# Altium PCB amg8833.PcbDoc
Units mm, origin at the board's own origin, x right, y up, seen from the top; angles counter-clockwise.
Board outline 25 x 17.5 mm, 2 copper layers (Top Layer, Bottom Layer); 10 components, 8 nets, 34 pads, 2 vias.
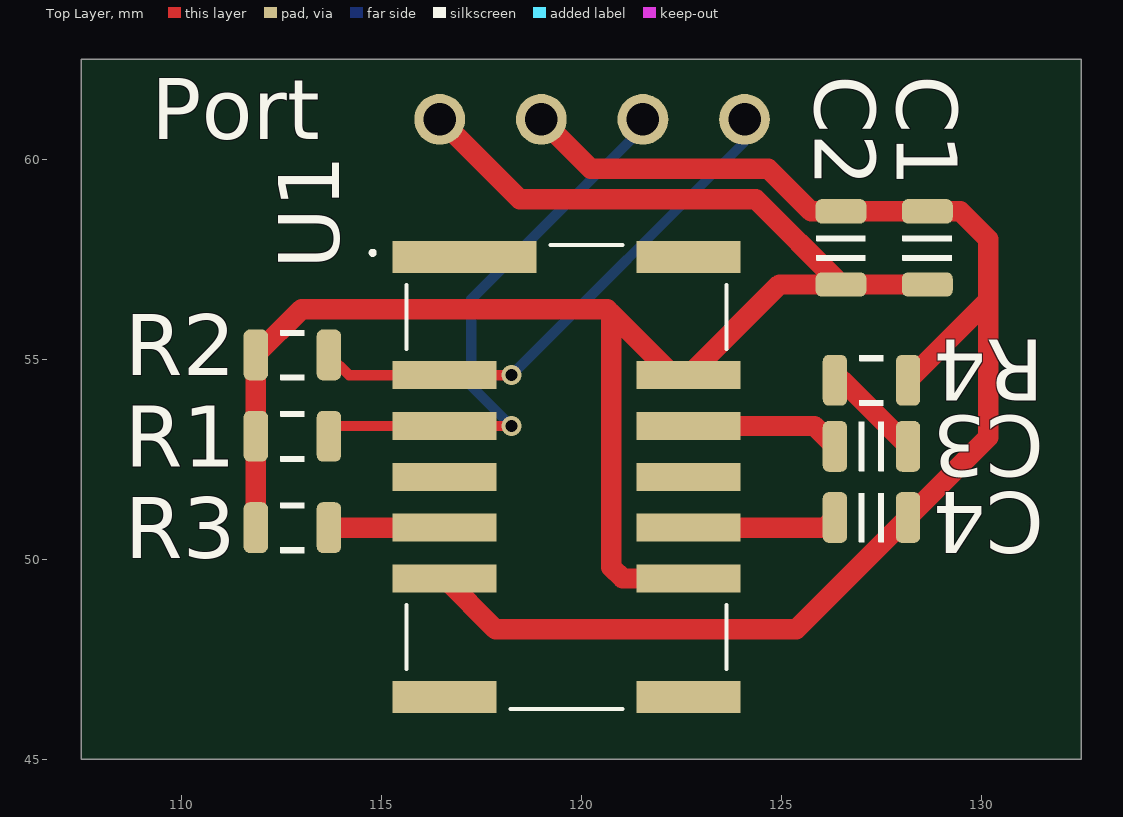
[diagram p0: Top Layer view]
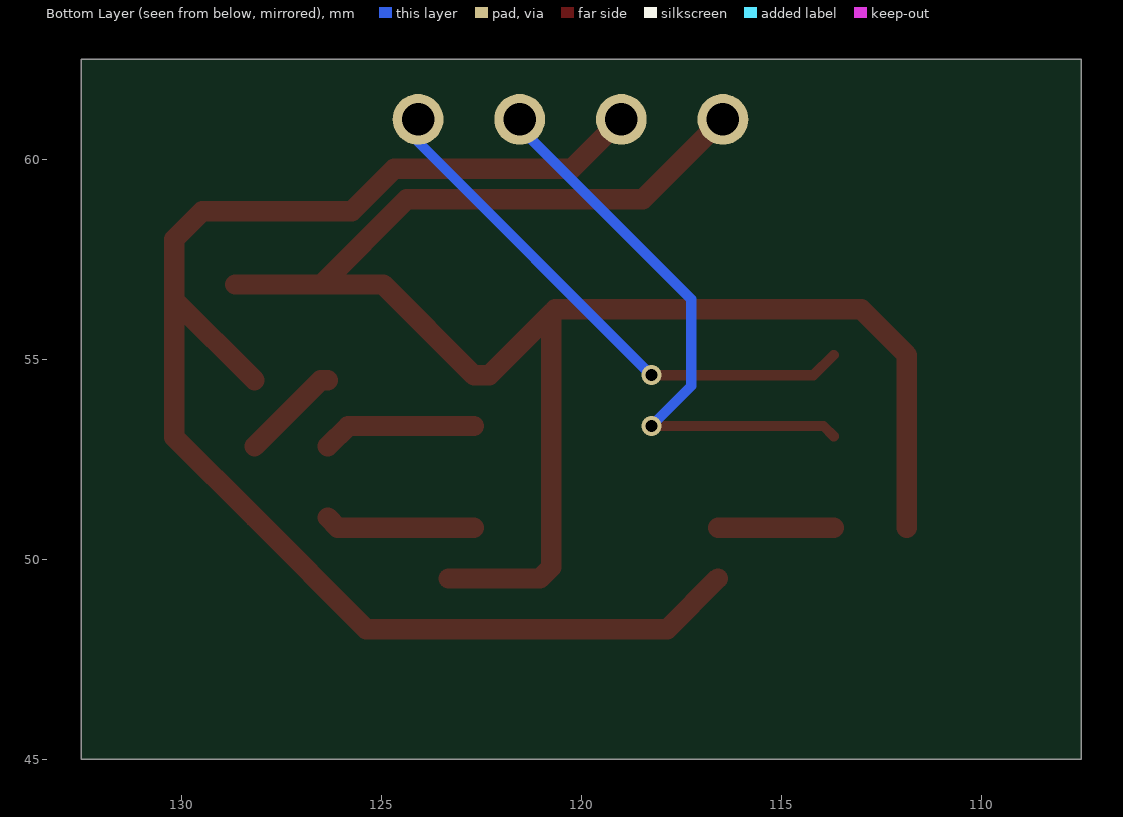
[diagram p1: Bottom Layer view, seen from below]
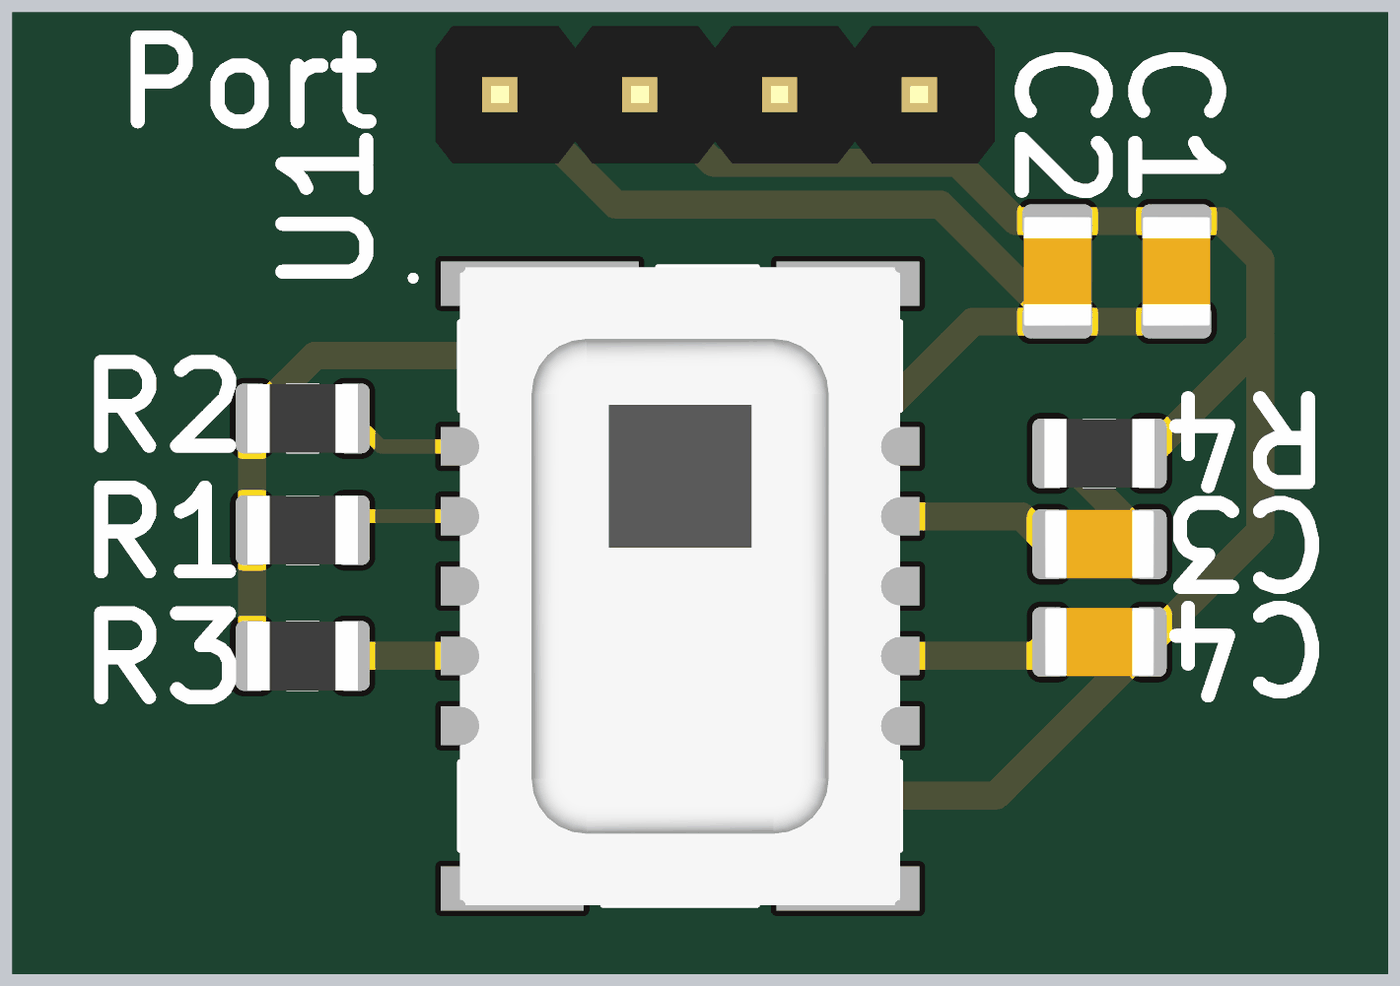
[diagram p2: 3D render of the assembled board from above, using the file's embedded part models]

## Layer stack, top to bottom
Top Solder: solder mask 0.0102, Solder Resist, Dk 3.5
Top Layer: signal copper 0.0356
Dielectric 1: dielectric 0.32, FR-4, Dk 4.8
Bottom Layer: signal copper 0.0356
Bottom Solder: solder mask 0.0102, Solder Resist, Dk 3.5

## Board outline
107.5,45 107.5,62.5 132.5,62.5 132.5,45

## Design rules (kind name [scope] priority, off if disabled: settings)
Clearance [All] p1: gap=0.254 ignorepadtopadclearanceinfootprint=FALSE except(0: Arc-Hole Track-Hole SMDPad-Hole THPad-Hole Via-Hole Fill-Hole Poly-Hole Region-Hole Text-Hole)
PolygonConnect [All] p1: connectstyle=Relief reliefconductorwidth=0.254 reliefentries=4 polygonreliefangle="90 Angle" airgapwidth=0.254
RoutingVias [All] p1: holewidth=0.711 width=1.27 viastyle="Through Hole" minholewidth=0.711 minwidth=1.27 maxholewidth=0.711 maxwidth=1.27
SolderMaskExpansion [All] p1: expansion=0.102
Width [All] p1: maxlimit=2.54 minlimit=0.254 preferedwidth=0.254 minimp=50.000000 maximp=50.000000 favimp=50.000000
30 further rules are at their usual default settings.

## Components (designator, comment, footprint, x,y, rotation, side; value= is the part's Value field where it differs from the comment)
C1 "C0805" CAP_0805 128.651,57.785 r270 top value=100nF
C2 "C0805" CAP_0805 126.492,57.785 r270 top value=10uF
C3 "C0805" CAP_0805 127.254,52.824 r180 top value=1uF
C4 "C0805" CAP_0805 127.254,51.046 r180 top value=2.2uF
Port "HDR1x4_2.54" HDR1x4_2.54_180 116.46,61 r90 top
R1 "R0805" RES_0805 112.776,53.078 r180 top value=10K
R2 "R0805" RES_0805 112.776,55.11 r180 top value=10K
R3 "R0805" RES_0805 112.776,50.792 r180 top value=10K
R4 "R0805" RES_0805 127.254,54.475 r180 top value=22
U1 "AMG8833" AMG8833 119.634,52.062 r270 top

## Footprints (in the part's own frame and the unit in brackets; to place one, negate y for a bottom-side part, rotate by r counter-clockwise, add the part's x,y. Pads: shape width x height; smd on the part's side, far side on the other; paste and mask are expansions set on the pad)
AMG8833 [mm] "20210906,HANGZHOU"
  rect 0.8x3.6 smd: 1(-5.5,-2.55)
  rect 0.7x2.6 smd: 2(-2.54,-3.05) 3(-1.27,-3.05) 4(0,-3.05) 5(1.27,-3.05) 6(2.54,-3.05) 9(2.54,3.05) 10(1.27,3.05) 11(0,3.05) 12(-1.27,3.05) 13(-2.54,3.05)
  rect 0.8x2.6 smd: 7(5.5,-3.05) 8(5.5,3.05) 14(-5.5,3.05)
  silkscreen extent -5.8,-4.9 5.8,4, body extent -5.8,-4 5.8,4, height 4.3
CAP_0805 [mil]
  rrect50% 24x50 smd: 1(-36,0) 2(36,0)
  silkscreen extent -12,-24 12,24, body extent -39,-25 39,25, height 39
HDR1x4_2.54_180 [mil]
  round 50 hole 32: 1(0,0) 2(0,-100) 3(0,-200) 4(0,-300)
  body extent -49,-350 49,50, height 323
RES_0805 [mil]
  rrect50% 24x50 smd: 1(-36,0) 2(36,0)
  silkscreen extent -12,-24 12,24, body extent -39,-25 39,25, height 24

## Part data
C1 C2 C3 C4: library part Cap_0805, "Capacitor", Specification="X7R 50V", Type=0805
Port: "Header"
R1 R2 R3 R4: library part Res_0805, "Resistor", Specification=±5%, Type=0805

## Via types
v1: diameter 0.5, hole 0.3, Top Layer to Bottom Layer, 2 vias

## Nets (pads, with @x,y where several pads share a name; then routed paths per layer and width w, separated by ;. In a path a pad name is that pad's centre, name@x,y a point inside that pad or via, vN(x,y) a via of type N, cw(c..) or ccw(c..) an arc to the next point about the centre after c; other vN are vias at no path point)
3V3: C1.2 C2.2 Port.1 R1.2 R2.2 R3.2 U1.9 U1.13 | length 43.8
  Top Layer w0.508: R3.2 R1.2 R2.2 113.005,56.253 120.65,56.253 ; Port.1 118.46,59 124.363,59 C2.2 ; U1.9@123.319,49.522 U1.9 121.031,49.522 120.75,49.803 120.75,56.153 122.301,54.602 U1.13 124.953,56.871 C2.2 ; C1.2 C2.2
GND: C1.1 C2.1 C4.1 Port.2 R4.1 U1.6 | length 36.3
  Top Layer w0.508: U1.6 117.854,48.252 125.374,48.252 C4.1 130.175,53.053 130.175,56.482 ; Port.2 120.238,59.762 124.678,59.762 125.741,58.699 C2.1 C1.1 129.476,58.699 130.175,58 130.175,56.482 ; R4.1 130.175,56.482
NetC3_1: C3.1 R4.2 | length 2.5
  Top Layer w0.508: R4.2 126.517,54.475 C3.1
NetC3_2: C3.2 U1.12 | length 3.9
  Top Layer w0.508: U1.12 125.832,53.332 C3.2
NetC4_2: C4.2 U1.10 | length 3.8
  Top Layer w0.508: U1.10 126.086,50.792 C4.2
NetR3_1: R3.1 U1.5 | length 2.9
  Top Layer w0.508: R3.1 U1.5
SCL: Port.3 R1.1 U1.3 | length 14.5
  Top Layer w0.254: R1.1 113.944,53.332 U1.3 v1(118.25,53.332)
  Bottom Layer w0.254: v1(118.25,53.332) 117.25,54.332 117.25,56.5 121.54,60.79 Port.3
SDA: Port.4 R2.1 U1.2 | length 13.6
  Top Layer w0.254: R2.1 114.198,54.602 U1.2 v1(118.25,54.602)
  Bottom Layer w0.254: v1(118.25,54.602) 124.08,60.432 Port.4
pads on no net: U1.1 U1.4 U1.7 U1.8 U1.11 U1.14

## Silkscreen, mask and mechanical layers (free items; w line width, h text height)
Mechanical 1:
  the board outline again, w0.203